# Altium PCB PcbLayout with radioenge.PcbDoc
Units mm, origin at the board's own origin, x right, y up, seen from the top; angles counter-clockwise.
Board outline 100 x 100 mm, 2 copper layers (Top Layer, Bottom Layer); 15 components, 13 nets, 81 pads, 1 vias.
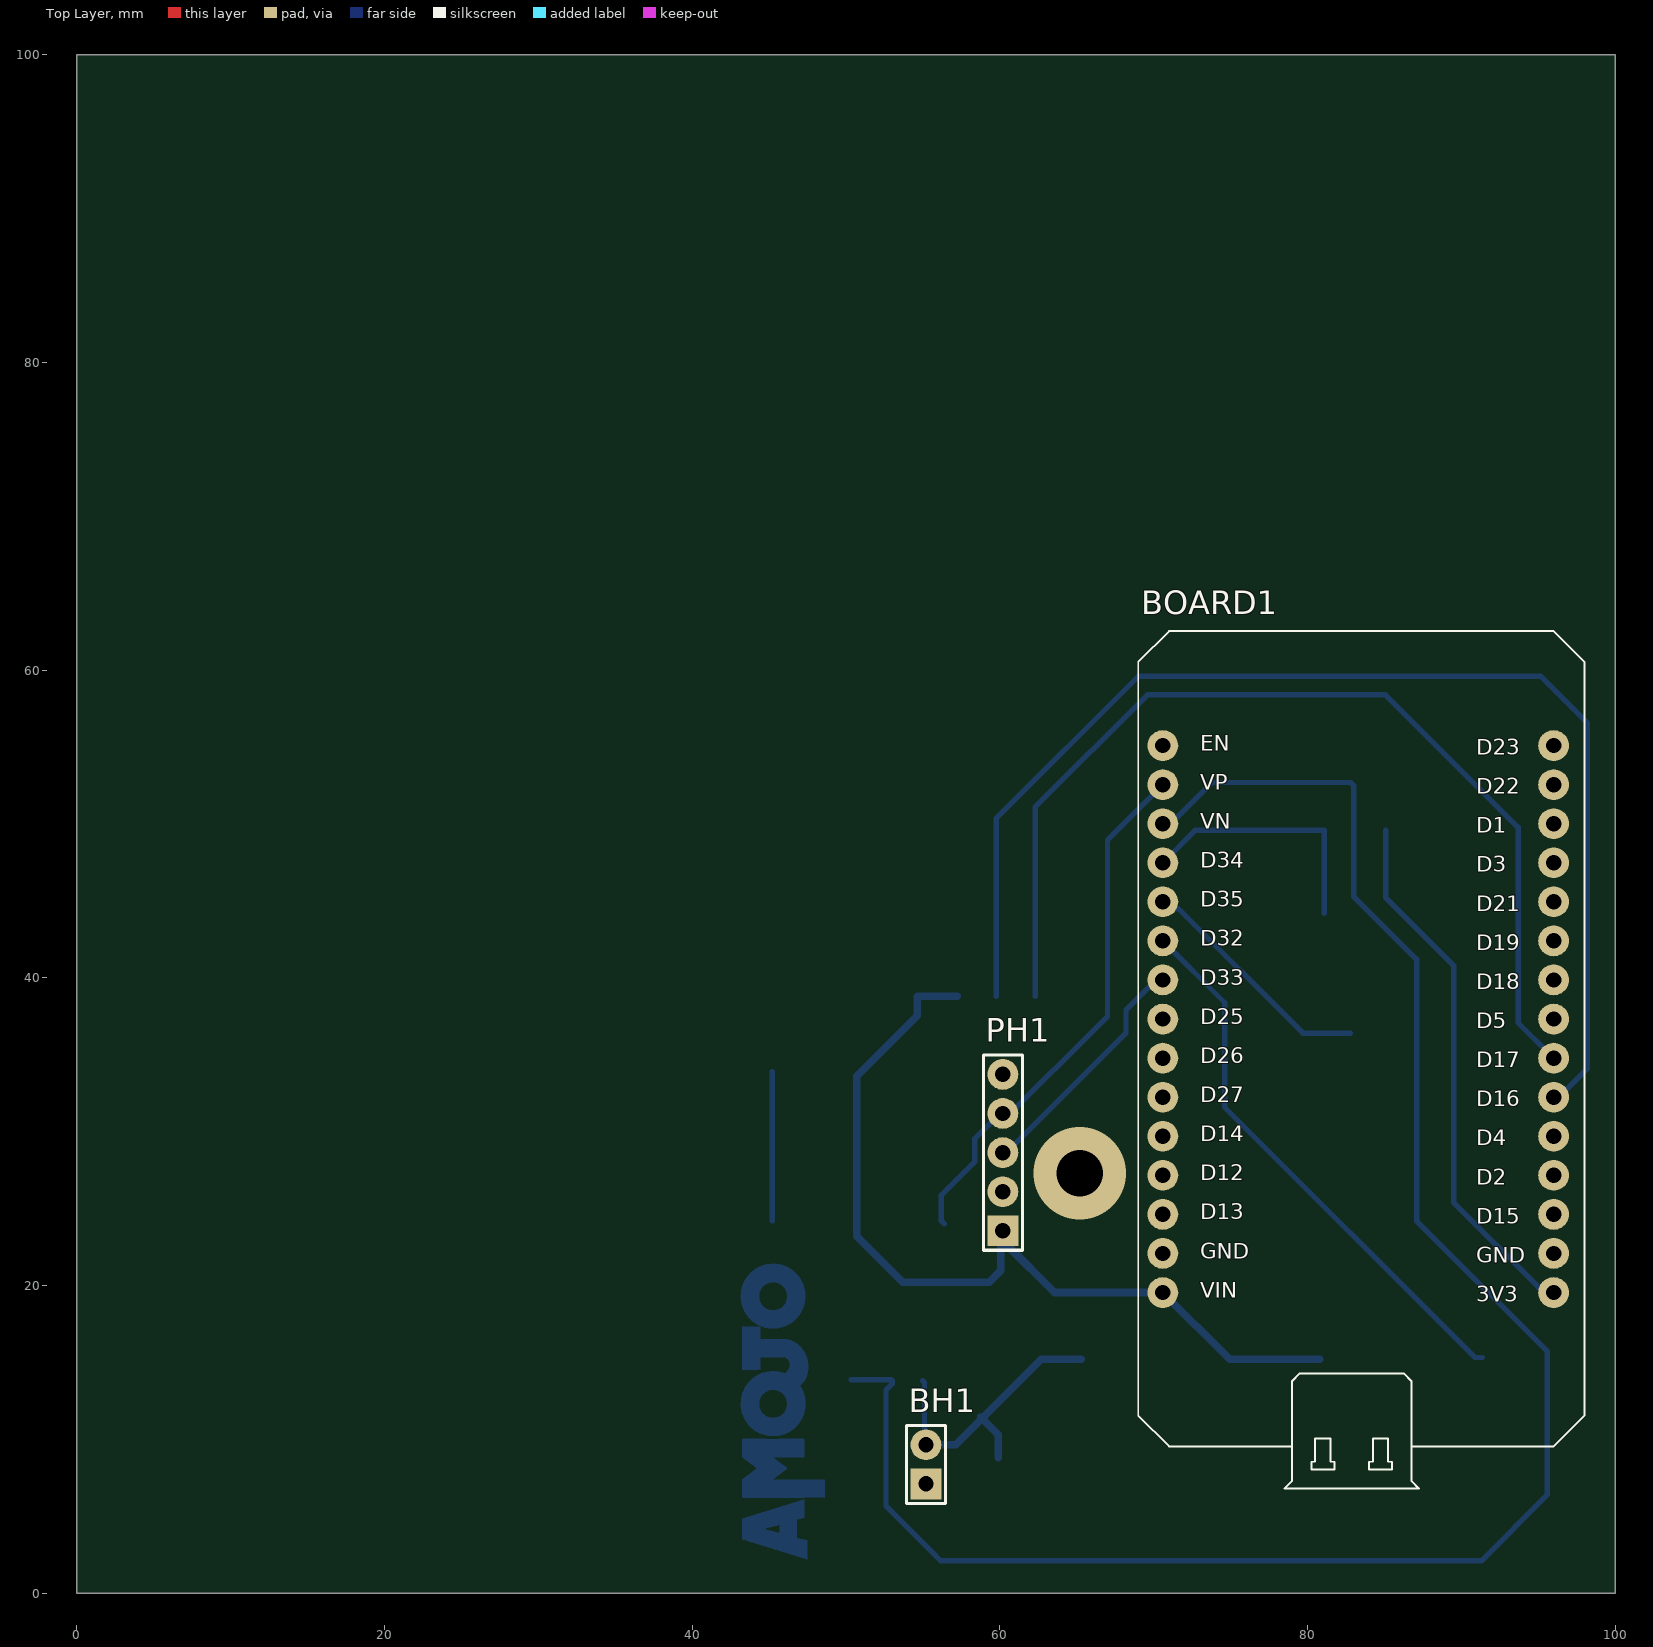
[diagram p0: Top Layer view]
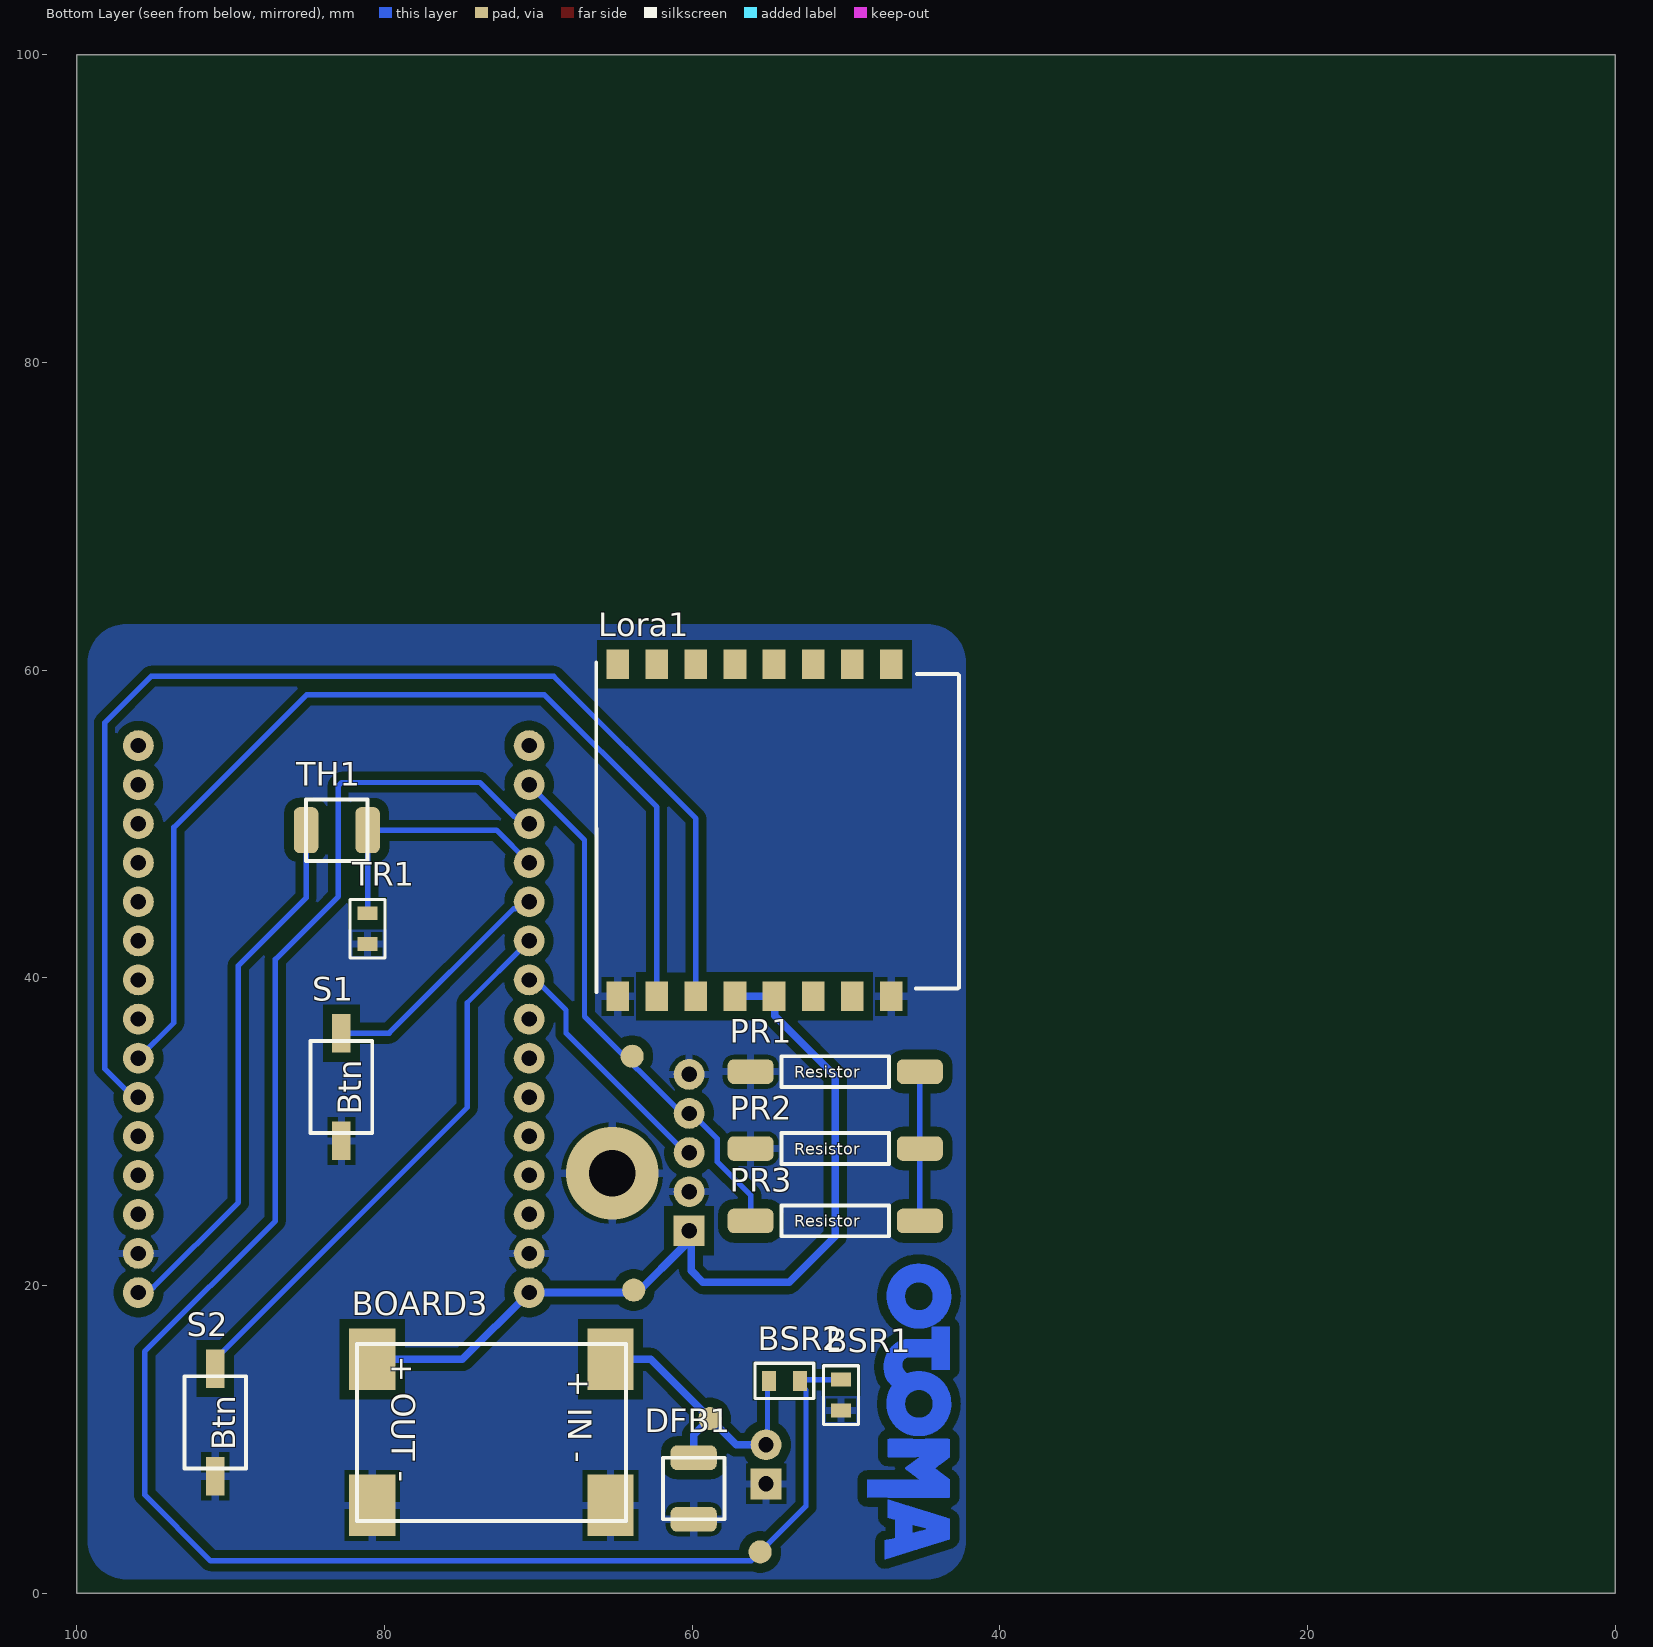
[diagram p1: Bottom Layer view, seen from below]

## Layer stack, top to bottom
Top Solder: solder mask 0.0102, Solder Resist, Dk 3.5
Top Layer: signal copper 0.0356
Dielectric 1: dielectric 0.32, FR-4, Dk 4.8
Bottom Layer: signal copper 0.0356
Bottom Solder: solder mask 0.0102, Solder Resist, Dk 3.5

## Board outline
0,0 100,0 100,100 0,100

## Design rules (kind name [scope] priority, off if disabled: settings)
Clearance [All] p1: gap=0.6 ignorepadtopadclearanceinfootprint=FALSE except(0: Arc-Hole Track-Hole SMDPad-Hole THPad-Hole Via-Hole Fill-Hole Poly-Hole Region-Hole Text-Hole; 0.254: Arc-Arc Arc-Track Track-Track SMDPad-SMDPad THPad-THPad THPad-Text; 0.3: Arc-Text Track-Text SMDPad-Text Via-Text Fill-Text Poly-Text Region-Text Text-Text; 0.4: Arc-Via Track-Via SMDPad-Via THPad-Via Via-Via; 0.5: Arc-SMDPad Arc-THPad Arc-Fill Arc-Poly Arc-Region Track-SMDPad Track-THPad Track-Fill Track-Poly Track-Region SMDPad-THPad)
PlaneClearance [All] p1: clearance=1.2
PlaneConnect [All] p1: planeconnectstyle=Relief reliefexpansion=0.508 reliefentries=4 reliefconductorwidth=0.5 reliefairgap=0.254
PolygonConnect [All] p1: connectstyle=Relief reliefconductorwidth=0.5 reliefentries=4 polygonreliefangle="90 Angle" airgapwidth=0.3
RoutingLayers [All] p1: top layer_v5=FALSE bottom layer_v5=TRUE
RoutingVias [All] p1: holewidth=0.711 width=1.27 viastyle="Through Hole" minholewidth=0.711 minwidth=1.27 maxholewidth=0.711 maxwidth=1.27
SolderMaskExpansion [All] p1: expansion=0.102 istentingtop=FALSE
Width [All] p1: maxlimit=0.5 minlimit=0.2 preferedwidth=0.35
27 further rules are at their usual default settings.

## Components (designator, comment, footprint, x,y, rotation, side; value= is the part's Value field where it differs from the comment)
BH1 "Constant Voltage Source" HDR1X2 55.2,7.1 r90 top
BOARD1 "ESP32DEVKITV1" ESP32-DEVKITV1 96,19.54 r90 top locked
BOARD3 "Step Down Buck DC DC 3A" "Step Down Buck DC DC 3A" 80.8,15.2 r270 bottom
BSR1 "Resistor_1" "Smd Resistor" 50.324,12.877 r90 bottom value=30k
BSR2 "" "Smd Resistor" 54,13.8 r0 bottom value=100k
DFB1 "" "Smd Thermistor Terminal" 59.9,4.8 r90 bottom
Lora1 "LoraWAN Radioenge" LORAMESH 50.997,49.595 r180 bottom
PH1 "Panel+Servo" HDR1X5 60.2,23.56 r90 top
PR1 "" "1/4W SMD Resistor" 56.7,33.9 r180 bottom value=10
PR2 "" "1/4W SMD Resistor" 56.7,28.9 r180 bottom value=10
PR3 "" "1/4W SMD Resistor" 56.7,24.2 r180 bottom value=10
S1 "Push Button Normally Opened" "Smd Push Button (Extended Legs)" 82.8,29.4 r90 bottom
S2 "Push Button Normally Opened" "Smd Push Button (Extended Legs)" 91,7.6 r90 bottom
TH1 "Thermistor" "Smd Thermistor Terminal" 81.1,49.6 r0 bottom
TR1 "Resistor_3" "Smd Resistor" 81.1,43.2 r90 bottom value=10k

## Footprints (in the part's own frame and the unit in brackets; to place one, negate y for a bottom-side part, rotate by r counter-clockwise, add the part's x,y. Pads: shape width x height; smd on the part's side, far side on the other; paste and mask are expansions set on the pad)
"1/4W SMD Resistor" [mm] "Footprint to use standard THC 1/4W Resistor"
  rrect50% 3x1.6 smd: 1(0.5,0) 2(11.5,0)
  silkscreen extent 2.5,-1 9.5,1
ESP32-DEVKITV1 [mm]
  round 2 hole 1: 3V3(0,0) D1(30.48,0) D2(7.62,0) D3(27.94,0) D4(10.16,0) D5(17.78,0) D12(7.62,25.4) D13(5.08,25.4) D14(10.16,25.4) D15(5.08,0) D16(12.7,0) D17(15.24,0) D18(20.32,0) D19(22.86,0) D21(25.4,0) D22(33.02,0) D23(35.56,0) D25(17.78,25.4) D26(15.24,25.4) D27(12.7,25.4) D32(22.86,25.4) D33(20.32,25.4) D34(27.94,25.4) D35(25.4,25.4) EN(35.56,25.4) GND(2.54,25.4) GND@1(2.54,0) VIN(0,25.4) VN(30.48,25.4) VP(33.02,25.4)
  silkscreen extent -12.75,-2 43,27
HDR1X2 [mm]
  rect 2x2 hole 1: 1(0,0)
  round 2 hole 1: 2(2.54,0)
  silkscreen extent -1.27,-1.27 3.81,1.27
HDR1X5 [mm] "Connector; Header; 5 Position"
  rect 2x2 hole 1: 1(0,0)
  round 2 hole 1: 2(2.54,0) 3(5.08,0) 4(7.62,0) 5(10.16,0)
  silkscreen extent -1.27,-1.27 11.43,1.27
LORAMESH [mil] "Kit LoraMesh"
  rect 58x75 smd: 2(-445,-425) 3(-345,-425) 6(-45,-425) 7(55,-425) 9(-545,425) 10(-445,425) 11(-345,425) 12(-245,425) 13(-145,425) 14(-45,425) 15(55,425) 16(155,425) Gnd(-545,-425) Gnd(155,-425) Vcc(-245,-425) Vcc(-145,-425)
  silkscreen extent -600,-415 328,430
"Smd Push Button (Extended Legs)" [mm] "Footprint for smd push button with extended legs"
  rect 2.5x1.2 smd: 1(0,0) 2(7,0)
  silkscreen extent 0.5,-2 6.5,2
"Smd Resistor" [mm]
  rect 0.9x1.3 smd: 1(-1,0) 2(1,0)
  silkscreen extent -1.9,-1.14 1.91,1.14
"Smd Thermistor Terminal" [mm]
  rrect50% 1.6x3 smd: 1(0,0) 2(4,0)
  silkscreen extent 0,-2 4,2
"Step Down Buck DC DC 3A" [mm] "Buck converter DC-DC 3A max"
  rect 4x3 smd: 1(0,15.5) 2(9.5,15.5) 3(0,0) 4(9.5,0)
  silkscreen extent -1,-1 10.5,16.5

## Part data
BH1: library part Battery, DC Magnitude=5, SimulationGenericComponent=True
BOARD1: "Dual core, Wi-Fi: 2.4 GHz up to 150 Mbits/s,BLE (Bluetooth Low Energy) and legacy Bluetooth, 32 bits, Up to 240 MHz", Package=Package, Availability=Unavailable, Check_prices=https://www.snapeda.com/parts/ESP32%20DEVKIT%20V1/Do%20it/view-part/5659245/?ref=eda, MF="Do it", MP="ESP32 DEVKIT V1", Price=None, SnapEDA_Link=https://www.snapeda.com/parts/ESP32%20DEVKIT%20V1/Do%20it/view-part/5659245/?ref=snap
BSR1 TR1: "Resistor", SimulationGenericComponent=True, TC1=0, TC2=0
BSR2: library part Resistor_2, "Resistor", SimulationGenericComponent=True, TC1=0, TC2=0
DFB1: library part Diode, "Diode", AF=1, BV=0, BV_MAX=1e99, CJO=0, CJP=0, CTA=0, CTP=0, EG=1.11, FC=0.5, FCS=0.5, FV_MAX=1e99, IBV=0.001, IKF=0, IKR=0, IS=1e-14, ISR=1e-14, JSW=0, JTUN=0, JTUNSW=0, KEG=1, KF=0, LEVEL=1, MJSW=0.33, N=1, NBV=1, NR=1, NS=1, NTUN=30, PHP=1, RS=0, SimulationGenericComponent=True, TCV=0, TLEV=0, TLEVC=0, TM1=0, TM2=0, TNOM=27, TPB=0, TPHP=0, TRS=0, TRS2=0, TT=0, TTT1=0, TTT2=0, VJ=1, XTI=3, XTITUN=3
PH1: library part "Header 5", "Header, 5-Pin", LatestRevisionDate=17-Jul-2002, LatestRevisionNote="Re-released for DXP Platform.", Publisher="Altium Limited"
PR1 PR2 PR3: library part Resistor, "Resistor", SimulationGenericComponent=True, TC1=0, TC2=0
S1 S2: library part "Push Button NO", closed=0, Rclosed=1m, Ropen=1Meg, SimulationGenericComponent=True

## Free pads (board coordinates)
  round 1.5 smd far side: 2(63.9,34.9) 3(63.8,19.7) 4(55.58,2.68) 6(58.846,11.346)

## Via types
v1: diameter 6, hole 3, Top Layer to Bottom Layer, 1 vias

## Nets (pads, with @x,y where several pads share a name; then routed paths per layer and width w, separated by ;. In a path a pad name is that pad's centre, name@x,y a point inside that pad or via, vN(x,y) a via of type N, cw(c..) or ccw(c..) an arc to the next point about the centre after c; other vN are vias at no path point)
3v3: BOARD1.3V3 TH1.2 | length 34.9
  Bottom Layer w0.35: TH1.2 85.1,45.2 89.5,40.8 89.5,25.4 95.044,19.856 95.684,19.856 BOARD1.3V3
5v: BOARD1.VIN BOARD3.3 Lora1.Vcc pad.3 PH1.1 | length 57.7
  Bottom Layer w0.35: Lora1.Vcc@54.628,38.748 Lora1.Vcc@54.68,38.8
  Bottom Layer w0.5: Lora1.Vcc@54.628,38.748 54.628,37.528 50.7,33.6 50.7,23.2 53.7,20.2 59.3,20.2 60.07,20.97 PH1.1@60.07,23.1 ; Lora1.Vcc@54.68,38.8 Lora1.Vcc@57.22,38.8 ; PH1.1@60,23.56 60,23.1 60.46,23.1 60.5,23.06 60.5,22.6 63.56,19.54 BOARD1.VIN 74.94,15.2 BOARD3.3
GND: BH1.1 BOARD1.GND BOARD1.GND@1 BOARD3.2 BOARD3.4 BSR1.1 DFB1.1 Lora1.Gnd PH1.2 PH1.5 PR1.1 PR2.1 S1.1 S2.1 TR1.1
  other v1: 65.2,27.3
NetBH1_2: BH1.2 BOARD3.1 BSR2.2 DFB1.2 pad.6 | length 20
  Bottom Layer w0.35: BSR2.2 55.1,13.7 55.1,9.74 BH1.2 ; pad.6@58.7,11.2 pad.6@58.7,11.493 ; pad.6 pad.6@58.7,11.493 ; pad.6@58.993,11.493 pad.6@58.7,11.493
  Bottom Layer w0.5: BH1.2 57.14,9.64 pad.6@58.7,11.2 ; pad.6 59.9,10.293 DFB1.2 ; pad.6@58.993,11.493 62.7,15.2 BOARD3.1
NetBOARD1_D16: BOARD1.D16 Lora1.3 | length 80.5
  Bottom Layer w0.35: Lora1.3 59.76,50.36 69,59.6 95.179,59.6 98.2,56.579 98.2,34.1 96.34,32.24 BOARD1.D16
NetBOARD1_D17: BOARD1.D17 Lora1.2 | length 66.2
  Bottom Layer w0.35: Lora1.2 62.3,51.1 69.6,58.4 85.076,58.4 93.7,49.776 93.7,37.08 BOARD1.D17
NetBOARD1_D32: BOARD1.D32 S2.2 | length 36
  Bottom Layer w0.35: BOARD1.D32 74.621,38.379 74.621,31.579 90.88,15.32 S2.2@91.375,15.32
NetBOARD1_D33: BOARD1.D33 PH1.3 | length 15.9
  Bottom Layer w0.35: PH1.3 60.44,28.64 68.2,36.4 68.2,37.9 70.16,39.86 BOARD1.D33
NetBOARD1_D34: BOARD1.D34 TH1.1 TR1.2 | length 16.8
  Bottom Layer w0.35: BOARD1.D34 72.72,49.6 TH1.1 81.1,46.933 TR1.2
NetBOARD1_D35: BOARD1.D35 S1.2 | length 15.7
  Bottom Layer w0.35: BOARD1.D35 71.047,44.94 71.495,44.492 71.608,44.492 79.7,36.4 S1.2
NetBOARD1_VN: BOARD1.VN BSR1.2 BSR2.1 pad.4 | length 122.2
  Bottom Layer w0.35: BSR1.2 52.923,13.877 BSR2.1 53,13.6 52.6,13.2 52.6,5.659 pad.4 56.159,2.1 91.3,2.1 95.6,6.4 95.6,15.7 87.1,24.2 87.1,41.2 83,45.3 83,52.495 82.795,52.7 73.8,52.7 71.588,50.488 71.515,50.488 71.047,50.02 BOARD1.VN
NetBOARD1_VP: BOARD1.VP pad.2 PH1.4 PR3.1 | length 35.2
  Bottom Layer w0.35: PR3.1@56.4,24 PR3.1 56.2,25.88 58.375,28.055 58.375,29.555 PH1.4@60,31.18 ; PH1.4@60.056,30.556 67,37.5 67,48.96 BOARD1.VP
NetPR1_2: PR1.2 PR2.2 PR3.2 | length 9.7
  Bottom Layer w0.35: PR3.2 PR2.2 PR1.2
pads on no net: BOARD1.D1 BOARD1.D2 BOARD1.D3 BOARD1.D4 BOARD1.D5 BOARD1.D12 BOARD1.D13 BOARD1.D14 BOARD1.D15 BOARD1.D18 BOARD1.D19 BOARD1.D21 BOARD1.D22 BOARD1.D23 BOARD1.D25 BOARD1.D26 BOARD1.D27 BOARD1.EN Lora1.6 Lora1.7 Lora1.9 Lora1.10 Lora1.11 Lora1.12 Lora1.13 Lora1.14 Lora1.15 Lora1.16

## Polygon pours and split planes (outlines as drawn)
GND on Bottom Layer "NONET_L-01_P-001" (solid, pour order 0): 96.76,63 cw(c96.76,60.46) 99.3,60.46 99.3,3.44 cw(c96.76,3.44) 96.76,0.9 44.74,0.9 cw(c44.74,3.44) 42.2,3.44 42.2,60.46 cw(c44.74,60.46) 44.74,63

## Other copper
Bottom Layer:
  region: 1466 vertices and 1 holes, not listed, extent 43.167,17.208 47.354,21.401
  region: 1935 vertices and 1 holes, not listed, extent 43.167,10.217 47.537,17.315
  region: 946 vertices and 1 holes, not listed, extent 43.249,2.19 47.493,6.068
  region: 931 vertices and 0 holes, not listed, extent 43.249,6.201 48.63,10.021

## Text inside footprints (layer, text, board x,y; h text height)
BOARD1: Top Overlay "3V3" at 90.96,18.94 h1.02; Top Overlay "GND" at 90.96,21.48 h1.02; Top Overlay "D15" at 90.96,24.02 h1.02; Top Overlay "D2" at 90.96,26.56 h1.02; Top Overlay "D4" at 90.96,29.1 h1.02; Top Overlay "D16" at 90.96,31.64 h1.02; Top Overlay "D17" at 90.96,34.18 h1.02; Top Overlay "D5" at 90.96,36.72 h1.02; Top Overlay "D18" at 90.96,39.26 h1.02; Top Overlay "D19" at 90.96,41.8 h1.02; Top Overlay "D21" at 90.96,44.34 h1.02; Top Overlay "D3" at 90.96,46.88 h1.02; Top Overlay "D1" at 90.96,49.42 h1.02; Top Overlay "D22" at 90.96,51.96 h1.02; Top Overlay "D23" at 90.96,54.5 h1.02; Top Overlay "VIN" at 73.03,19.21 h1.02; Top Overlay "GND" at 73.03,21.75 h1.02; Top Overlay "D13" at 73.03,24.29 h1.02; Top Overlay "D12" at 73.03,26.83 h1.02; Top Overlay "D14" at 73.03,29.37 h1.02; Top Overlay "D27" at 73.03,31.91 h1.02; Top Overlay "D26" at 73.03,34.45 h1.02; Top Overlay "D25" at 73.03,36.99 h1.02; Top Overlay "D33" at 73.03,39.53 h1.02; Top Overlay "D32" at 73.03,42.07 h1.02; Top Overlay "D35" at 73.03,44.61 h1.02; Top Overlay "D34" at 73.03,47.15 h1.02; Top Overlay "VN" at 73.03,49.69 h1.02; Top Overlay "VP" at 73.03,52.23 h1.02; Top Overlay "EN" at 73.03,54.77 h1.02; Mechanical 13 "ESP32-DEVKITV1" at 100.54,45.9 h1.27 r90
BOARD3: Bottom Overlay "+ IN -" at 68.046,14.446 h1.52 r90; Bottom Overlay "+ OUT -" at 79.546,15.446 h1.52 r90
PR1: Bottom Overlay "Resistor" at 53.357,33.507 h0.75
PR2: Bottom Overlay "Resistor" at 53.357,28.507 h0.75
PR3: Bottom Overlay "Resistor" at 53.357,23.807 h0.75
S1: Bottom Overlay "Btn" at 81.5,31.1 h1.52 r270
S2: Bottom Overlay "Btn" at 89.7,9.3 h1.52 r270